# Altium PCB MJVESC_MINI_VER03.PcbDoc (part 1 of 3)
Units mm, origin at the board's own origin, x right, y up, seen from the top; angles counter-clockwise.
Board outline 57.82 x 58.2 mm, 4 copper layers (Top Layer, Mid Layer 1, Mid Layer 2, Bottom Layer), stack 1.63 mm thick; 123 components, 106 nets, 471 pads, 471 vias.
Unrouted connection lines stored in the file: 33.
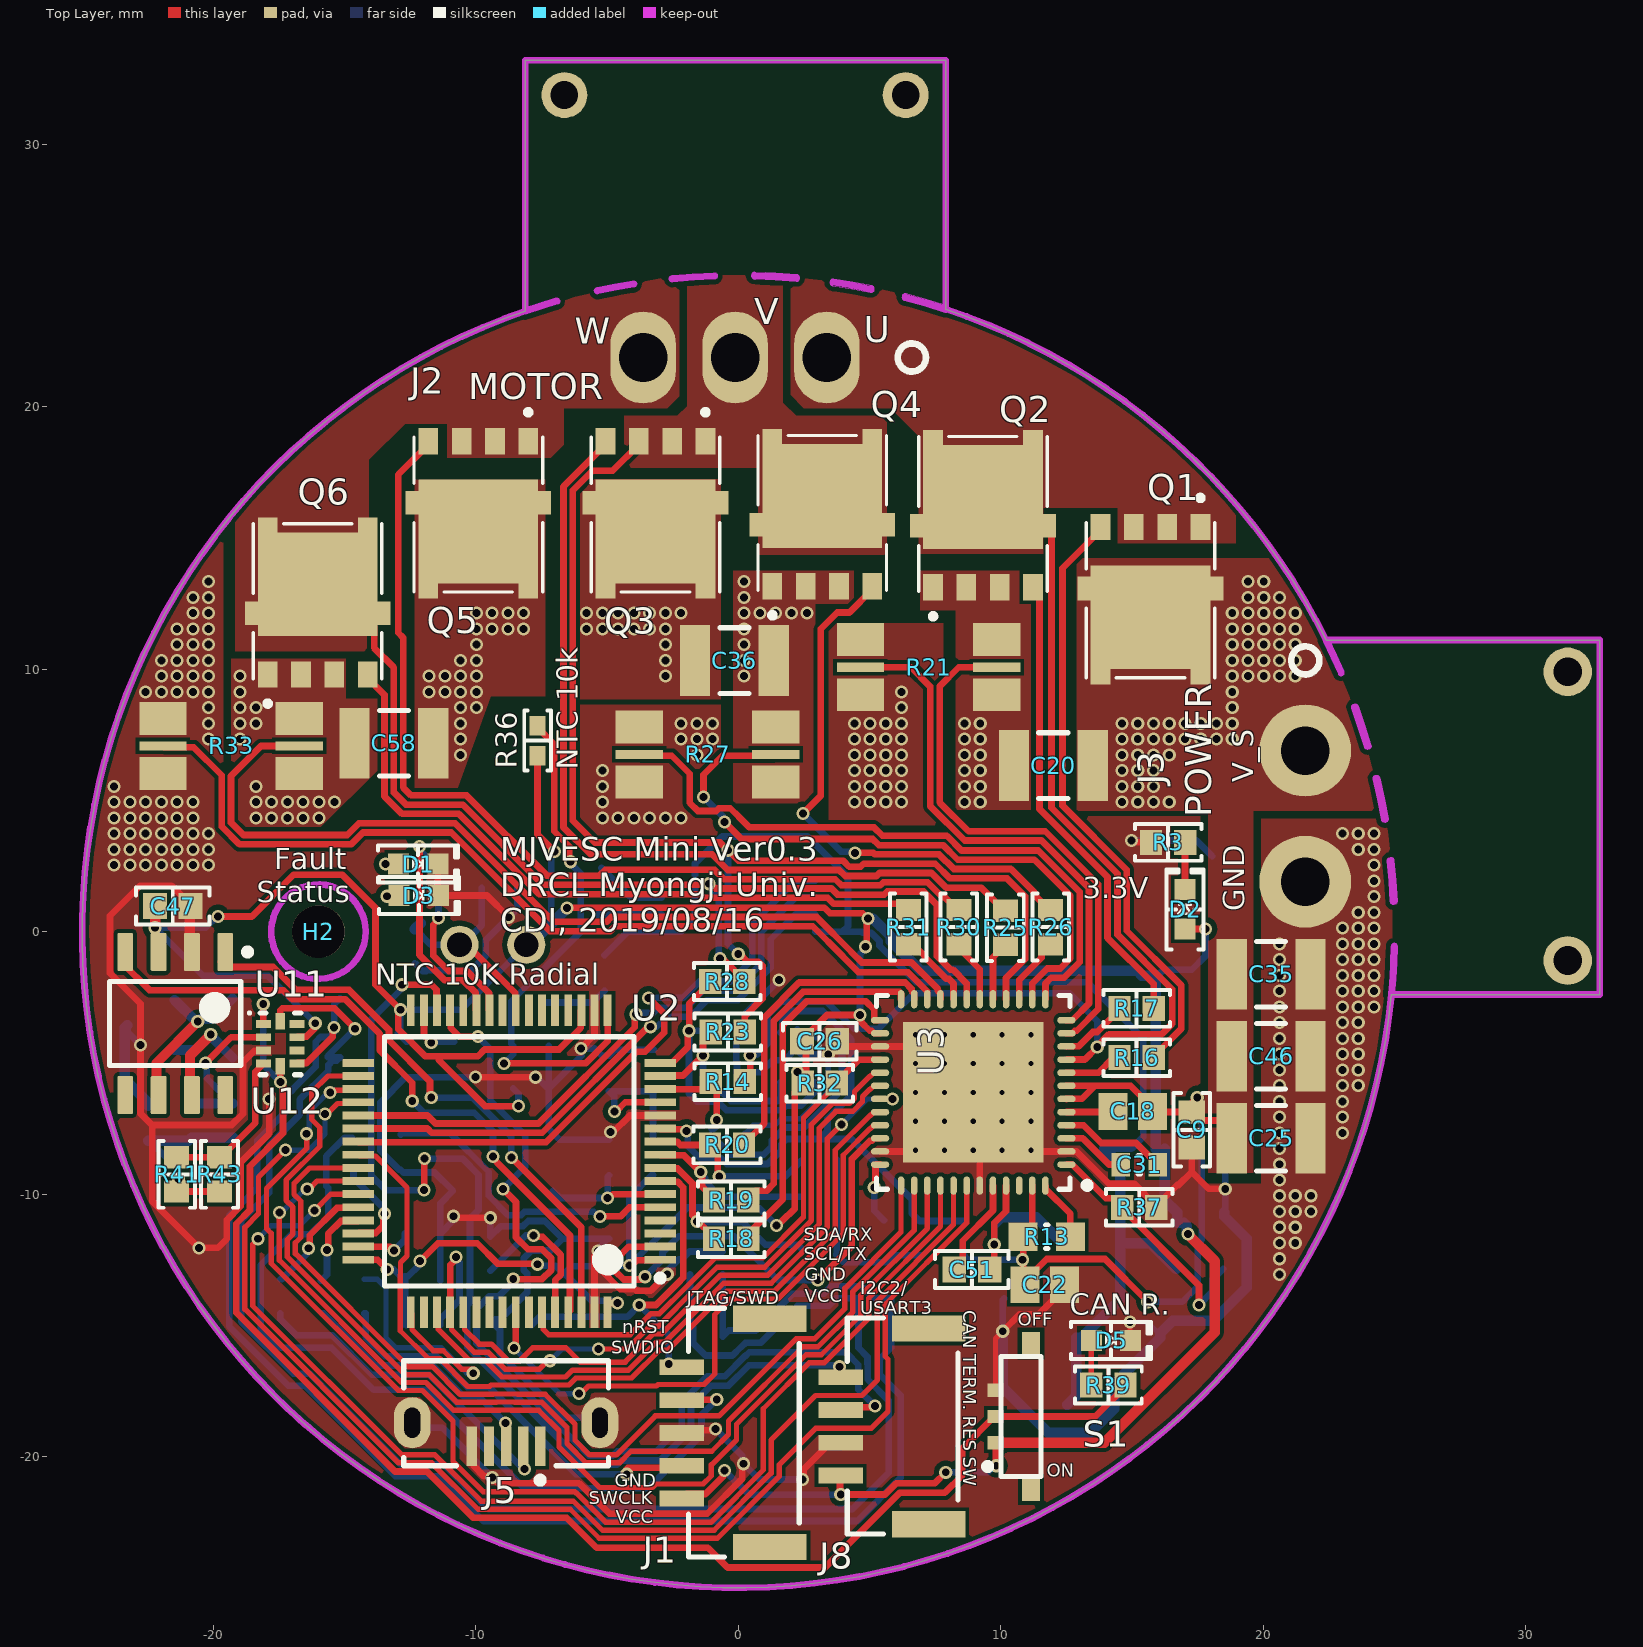
[diagram p0: Top Layer view]
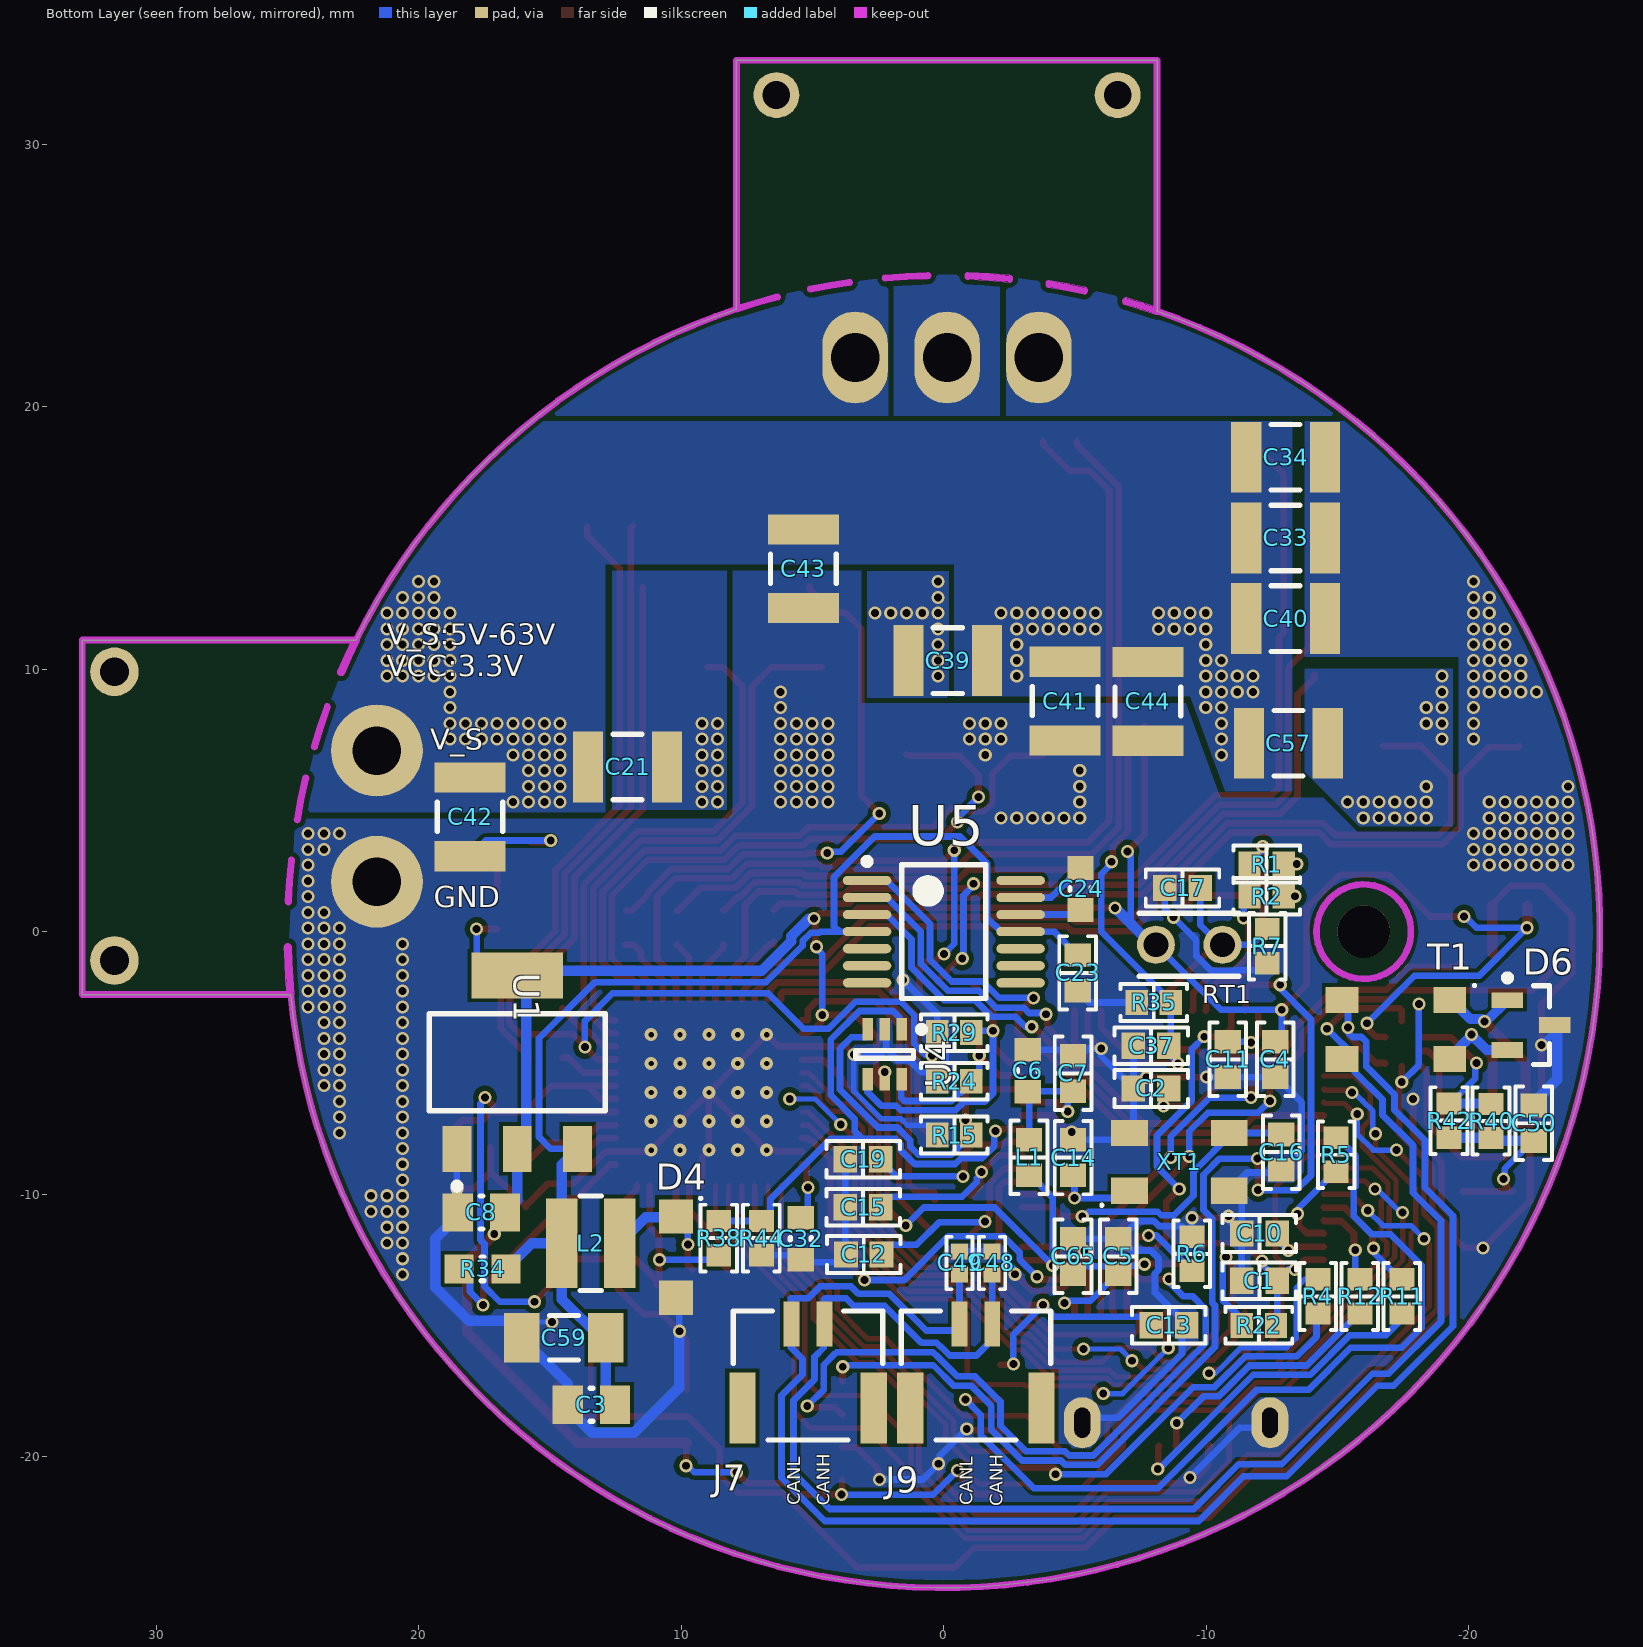
[diagram p1: Bottom Layer view, seen from below]

## Layer stack, top to bottom
Top Solder: solder mask 0.0102, Solder Resist, Dk 3.5
Top Layer: signal copper 0.07
Dielectric 1: core 0.45, FR-4, Dk 4.2
Mid Layer 1: signal copper 0.07
Dielectric 3: prepreg 0.45, FR-4, Dk 4.2
Mid Layer 2: signal copper 0.07
Dielectric 2: core 0.45, FR-4, Dk 4.2
Bottom Layer: signal copper 0.07
Bottom Solder: solder mask 0.0102, Solder Resist, Dk 3.5

## Board outline
7.898,23.72 cw(c0,0) 22.395,11.111 22.395,11.11 32.825,11.11 32.825,-2.398 24.887,-2.398 24.885,-2.398 cw(c0,0) -8.123,23.644 -8.125,23.644 -8.125,33.2 7.9,33.2
cut-out: 22.281,11.054 cw(c0,0) 22.849,9.827 ccw(c22.966,9.877) 23.093,9.877 ccw(c22.966,9.877) 23.083,9.928 ccw(c0,0) 22.509,11.167 ccw(c22.395,11.111)
cut-out: 23.858,7.03 ccw(c0,0) 23.373,8.506 cw(c23.493,8.55) 23.612,8.593 cw(c0,0) 24.103,7.102 cw(c23.981,7.066) 24.108,7.066 cw(c23.981,7.066)
cut-out: 24.505,4.263 ccw(c0,0) 24.186,5.805 cw(c24.31,5.835) 24.433,5.864 cw(c0,0) 24.756,4.306 cw(c24.63,4.285) 24.757,4.285 cw(c24.63,4.285)
cut-out: 24.846,1.148 ccw(c0,0) 24.727,2.689 cw(c24.853,2.703) 24.98,2.717 cw(c0,0) 25.101,1.159 cw(c24.973,1.153) 25.101,1.153 cw(c24.973,1.153)
cut-out: 24.76,-2.365 ccw(c24.887,-2.377) 25.014,-2.388 ccw(c0.004,0) 25.121,-0.578 ccw(c24.993,-0.577) 24.866,-0.572 cw(c0.01,-0.001)
cut-out: -8.083,23.522 cw(c-8.125,23.643) -8.166,23.763 cw(c0,0) -6.969,24.142 cw(c-6.934,24.019) -6.807,24.019 cw(c-6.934,24.019) -6.899,23.897 ccw(c0,0)
cut-out: -5.327,24.295 cw(c-5.354,24.42) -5.382,24.544 cw(c0,0) -4.025,24.803 cw(c-4.004,24.677) -3.877,24.677 cw(c-4.004,24.677) -3.984,24.551 ccw(c0,0)
cut-out: -2.49,24.748 cw(c-2.502,24.874) -2.515,25.001 cw(c0,0) -0.929,25.11 cw(c-0.925,24.983) -0.797,24.983 cw(c-0.925,24.983) -0.92,24.856 ccw(c0,0)
cut-out: 0.622,24.865 cw(c0,0) 2.198,24.775 ccw(c2.209,24.902) 2.336,24.902 ccw(c2.209,24.902) 2.22,25.029 ccw(c0,0) 0.628,25.12 ccw(c0.625,24.992)
cut-out: 3.598,24.611 cw(c0,0) 5.031,24.358 ccw(c5.057,24.483) 5.184,24.483 ccw(c5.057,24.483) 5.083,24.608 ccw(c0,0) 3.635,24.863 ccw(c3.616,24.737)
cut-out: 6.33,24.054 cw(c0,0) 7.86,23.598 ccw(c7.9,23.719) 8.027,23.719 ccw(c7.9,23.719) 7.94,23.84 ccw(c0,0) 6.395,24.3 ccw(c6.362,24.177)

## Design rules (kind name [scope] priority, off if disabled: settings)
Clearance [All] p1: gap=0.15 ignorepadtopadclearanceinfootprint=FALSE except(0: Arc-Hole Track-Hole SMDPad-Hole THPad-Hole Via-Hole Fill-Hole Poly-Hole Region-Hole Text-Hole; 0.1: Arc-Arc Arc-Track Track-Track; 0.203: THPad-Via THPad-Fill THPad-Poly THPad-Region THPad-Text Via-Via Via-Fill Via-Poly Via-Region Via-Text Fill-Fill Fill-Poly Fill-Region Fill-Text Poly-Poly Poly-Region Poly-Text Region-Region Region-Text Text-Text)
DiffPairsRouting [All] p1: maxlimit=0.254 minlimit=0.203 mostfreqgap=0.203 toplayer_minwidth=0.203 toplayer_maxwidth=0.381 toplayer_prefwidth=0.254 midlayer1_minwidth=0.203 midlayer1_maxwidth=0.381 midlayer1_prefwidth=0.254 midlayer2_minwidth=0.203 midlayer2_maxwidth=0.381 midlayer2_prefwidth=0.254 bottomlayer_minwidth=0.203 bottomlayer_maxwidth=0.381 bottomlayer_prefwidth=0.254 maxuncoupledlength=12.7
HoleToHoleClearance [All] p1: gap=0.2 allowstackedmicrovias=TRUE
MinimumSolderMaskSliver [All] p1: minsoldermaskwidth=0.04
PolygonConnect "PolygonConnect - V_SUPPLY" [InNet('V_SUPPLY')] p1: connectstyle=Direct reliefconductorwidth=0.254 reliefentries=4 polygonreliefangle="90 Angle" airgapwidth=0.254
PolygonConnect "PolygonConnect - PH_A" [InNet('PH_A')] p2: connectstyle=Direct reliefconductorwidth=0.254 reliefentries=4 polygonreliefangle="90 Angle" airgapwidth=0.254
PolygonConnect "PolygonConnect - NetC20_2" [InNet('NetC20_2')] p3: connectstyle=Direct reliefconductorwidth=0.254 reliefentries=4 polygonreliefangle="90 Angle" airgapwidth=0.254
PolygonConnect "PolygonConnect - NetC36_2" [InNet('NetC36_2')] p4: connectstyle=Direct reliefconductorwidth=0.254 reliefentries=4 polygonreliefangle="90 Angle" airgapwidth=0.254
PolygonConnect "PolygonConnect - NetC57_2" [InNet('NetC57_2')] p5: connectstyle=Direct reliefconductorwidth=0.254 reliefentries=4 polygonreliefangle="90 Angle" airgapwidth=0.254
PolygonConnect "PolygonConnect - PH_B" [InNet('PH_B')] p6: connectstyle=Direct reliefconductorwidth=0.254 reliefentries=4 polygonreliefangle="90 Angle" airgapwidth=0.254
PolygonConnect "PolygonConnect - PH_C" [InNet('PH_C')] p7: connectstyle=Direct reliefconductorwidth=0.254 reliefentries=4 polygonreliefangle="90 Angle" airgapwidth=0.254
PolygonConnect "PolygonConnect - SHA" [InNet('SHA')] p8: connectstyle=Direct reliefconductorwidth=0.254 reliefentries=4 polygonreliefangle="90 Angle" airgapwidth=0.254
PolygonConnect "PolygonConnect - SHB" [InNet('SHB')] p9: connectstyle=Direct reliefconductorwidth=0.254 reliefentries=4 polygonreliefangle="90 Angle" airgapwidth=0.254
PolygonConnect "PolygonConnect - SHC" [InNet('SHC')] p10: connectstyle=Direct reliefconductorwidth=0.254 reliefentries=4 polygonreliefangle="90 Angle" airgapwidth=0.254
PolygonConnect "PolygonConnect - GND" [InNet('GND')] p11: connectstyle=Direct reliefconductorwidth=0.254 reliefentries=4 polygonreliefangle="90 Angle" airgapwidth=0.254
PolygonConnect [All] p12: connectstyle=Relief reliefconductorwidth=0.254 reliefentries=4 polygonreliefangle="90 Angle" airgapwidth=0.254
RoutingVias [All] p1: holewidth=0.711 width=1.27 viastyle="Through Hole" minholewidth=0.711 minwidth=1.27 maxholewidth=0.711 maxwidth=1.27 useviatemplates=TRUE viatemplateguid#1={498FC635-D1B7-4224-9D86-076B19A399F8} viatemplatename#1=v50h30m0mx0
SilkToSilkClearance [All] p1 off: silktosilkclearance=0.254
SilkToSolderMaskClearance [IsPad] p1 off: minsilkscreentomaskgap=0.1 clearancetoexposedcopper=TRUE
SolderMaskExpansion [All] p1: expansion=0.102
Width [All] p1: maxlimit=0.4 minlimit=0.203 preferedwidth=0.254
25 further rules are at their usual default settings.

## Classes and differential pairs
component class mcu: C1 C2 C3 C4 C5 C6 C7 C8 C10 C11 C13 C14 C16 C17 C23 C24 C65 D1 D2 D3 J1 J2 J3 J5 J7 J8 J9 L1 R1 R2 R3 R4 R5 R6 R7 R11 R12 RT1 U1 U2 U5 XT1
component class DRV8301: C9 C12 C15 C18 C19 C20 C21 C22 C25 C26 C31 C32 C33 C34 C35 C36 C37 C39 C40 C41 C42 C43 C44 C46 C51 C57 C58 C59 D4 H2 L2 Q1 Q2 Q3 Q4 Q5 Q6 R13 R14 R15 R16 R17 R18 R19 R20 R21 R22 R23 R24 R25 R26 R27 R28 R29 R30 R31 R32 R33 R34 R35 R36 R37 R38 R44 U3 U4
component class CAN: C47 C48 C49 C50 D5 D6 R39 R40 R41 R42 R43 S1 T1 U11 U12
differential pair CANHL: +CANHL_P -CANHL_N
differential pair USB_D: +USB_D_P -USB_D_N
differential pair CAN: +CAN_P -CAN_N
differential pair CAN_TRES: +CAN_TRES_P -CAN_TRES_N

## Components (designator, comment, footprint, x,y, rotation, side; value= is the part's Value field where it differs from the comment)
C1 "0.10µF" "CAP 0603/1608" -12.027,-13.303 r180 bottom
C2 "0.10µF" "CAP 0603/1608" -7.9,-5.975 r0 bottom
C3 "4.7uF" CAPC0805(2012)145_N 13.425,-18.025 r180 bottom
C4 "0.10µF" "CAP 0603/1608" -12.627,-4.869 r90 bottom
C5 "0.10µF" "CAP 0603/1608" -6.65,-12.375 r90 bottom
C6 "1uF 6.3V" CAPC0603(1608)100_N -3.2,-5.3 r90 bottom value=1uF
C7 "0.10µF" "CAP 0603/1608" -4.927,-5.403 r90 bottom
C8 "4.7uF" CAPC0805(2012)145_N 17.619,-10.7 r180 bottom
C9 "0.1uF 100V" "CAP 0603/1608" 17.275,-7.55 r90 top
C10 "2.2µF" "CAP 0603/1608" -12.027,-11.498 r180 bottom
C11 "2.2µF" "CAP 0603/1608" -10.822,-4.869 r90 bottom
C12 "4.7nF" "CAP 0603/1608" 3.05,-12.3 r0 bottom
C13 "0.10µF" "CAP 0603/1608" -8.575,-15 r0 bottom
C14 "10pF" "CAP 0603/1608" -4.927,-8.607 r90 bottom
C15 "4.7nF" "CAP 0603/1608" 3.075,-10.5 r0 bottom
C16 "10pF" "CAP 0603/1608" -12.86,-8.403 r270 bottom
C17 "2.2µF" "CAP 0603/1608" -9.096,1.664 r180 bottom
C18 "1uF 100V" C0805 15.025,-6.85 r0 top
C19 "4.7nF" "CAP 0603/1608" 3.075,-8.675 r0 bottom
C20 "CAP 10uF 100V 1210(3225)" CAPC1210(3225)280_N 12,6.325 r180 top value=10uF
C21 "CAP 10uF 100V 1210(3225)" CAPC1210(3225)280_N 12.05,6.275 r180 bottom value=10uF
C22 "1uF 100V" C0805 11.675,-13.45 r180 top
C23 "0.10µF" "CAP 0603/1608" -5.1,-1.575 r90 bottom
C24 "1uF 6.3V" CAPC0603(1608)100_N -5.213,1.625 r90 bottom value=1uF
C25 "CAP 10uF 100V 1210(3225)" CAPC1210(3225)280_N 20.3,-7.872 r0 top value=10uF
C26 "0.10µF" "CAP 0603/1608" 3.1,-4.175 r0 top
C31 "47nF" CAPC0603(1608)100_L 15.275,-8.875 r0 top
C32 "1uF 6.3V" CAPC0603(1608)100_N 5.45,-11.701 r90 bottom value=1uF
C33 "CAP 10uF 100V 1210(3225)" CAPC1210(3225)280_N -13.025,15 r180 bottom value=10uF
C34 "CAP 10uF 100V 1210(3225)" CAPC1210(3225)280_N -13.025,18.075 r180 bottom value=10uF
C35 "CAP 10uF 100V 1210(3225)" CAPC1210(3225)280_N 20.3,-1.625 r0 top value=10uF
C36 "CAP 10uF 100V 1210(3225)" CAPC1210(3225)280_N -0.15,10.325 r0 top value=10uF
C37 "2.2µF" "CAP 0603/1608" -7.9,-4.35 r180 bottom
C39 "CAP 10uF 100V 1210(3225)" CAPC1210(3225)280_N -0.15,10.325 r0 bottom value=10uF
C40 "CAP 10uF 100V 1210(3225)" CAPC1210(3225)280_N -13.025,11.925 r180 bottom value=10uF
C41 "CAP 10uF 100V 1210(3225)" CAPC1210(3225)280_N -4.625,8.782 r270 bottom value=10uF
C42 "CAP 10uF 100V 1210(3225)" CAPC1210(3225)280_N 18.05,4.375 r270 bottom value=10uF
C43 "CAP 10uF 100V 1210(3225)" CAPC1210(3225)280_N 5.35,13.825 r270 bottom value=10uF
C44 "CAP 10uF 100V 1210(3225)" CAPC1210(3225)280_N -7.775,8.775 r270 bottom value=10uF
C46 "CAP 10uF 100V 1210(3225)" CAPC1210(3225)280_N 20.3,-4.75 r0 top value=10uF
C47 "2.2µF" "CAP 0603/1608" -21.55,0.975 r180 top
C48 "100pF" "CAP 0402/1005" -1.841,-12.625 r270 bottom
C49 "100pF" "CAP 0402/1005" -0.6,-12.625 r90 bottom
C50 "4.7nF" "CAP 0603/1608" -22.475,-7.3 r90 bottom
C51 "220nF" "CAP 0603/1608" 8.9,-12.875 r180 top
C57 "CAP 10uF 100V 1210(3225)" CAPC1210(3225)280_N -13.129,7.175 r180 bottom value=10uF
C58 "CAP 10uF 100V 1210(3225)" CAPC1210(3225)280_N -13.125,7.175 r180 top value=10uF
C59 "10uF" CAPC1206(3216)190_M 14.475,-15.475 r180 bottom
C65 "0.10µF" "CAP 0603/1608" -4.925,-12.375 r270 bottom
D1 "Red" "LED 0603/1608 RED" -12.2,2.575 r0 top
D2 "Blue" "LED 0603/1608 BLUE" 17.019,0.85 r90 top
D3 "Green" "LED 0603/1608 GREEN" -12.175,1.375 r0 top
D4 "PMEG6020AELR" SOD123W 10.2,-12.4 r270 bottom
D5 "Red" "LED 0603/1608 RED" 14.2,-15.575 r0 top
D6 "Bidirectional Symmetric TVS" SOT23-3L -22.375,-3.56 r180 bottom
H2 "Hole" M2-HOLE -16,0 r0 top
J1 "JTAG/SWD" "JST BM05B-GHS-TBT" 0.287,-19.1 r270 top
J2 "MOTOR" "MR30PW - MIRROR" -3.625,21.875 r0 top
J3 "POWER" "XT30PW - MIRROR" 21.6,1.9 r90 top
J5 "USB3140-30-0230-1-C" GCT-USB3140_V -8.85,-19.155 r180 top
J7 "CAN" "JST SM02B-GHS-TB" 5.173,-16.825 r0 bottom
J8 "I2C/UART3" "JST BM04B-GHS-TBT" 6.337,-18.85 r270 top
J9 "CAN" "JST SM02B-GHS-TB" -1.225,-16.825 r0 bottom
L1 "Ferrite Beads 600ohm" "FER 0603/1608" -3.25,-8.6 r270 bottom value=10mH
L2 "22uH" 74438335220 13.45,-11.875 r0 bottom
Q1 "NTMFS5C604NLT1G" DFN500X600X110-5N 15.703,12.622 r180 top
Q2 "NTMFS5C604NLT1G" DFN500X600X110-5N 9.32,15.913 r0 top
Q3 "NTMFS5C604NLT1G" DFN500X600X110-5N -3.155,15.888 r180 top
Q4 "NTMFS5C604NLT1G" DFN500X600X110-5N 3.197,15.953 r0 top
Q5 "NTMFS5C604NLT1G" DFN500X600X110-5N -9.905,15.888 r180 top
Q6 "NTMFS5C604NLT1G" DFN500X600X110-5N -16.03,12.587 r0 top
R1 "220R" "RES 0603/1608" -12.3,2.575 r180 bottom
R2 "220R" "RES 0603/1608" -12.3,1.35 r180 bottom
R3 "1k" "RES 0603/1608" 16.375,3.4 r180 top
R4 "22R" "RES 0603/1608" -14.25,-13.9 r90 bottom
R5 "22R" "RES 0603/1608" -14.95,-8.502 r270 bottom
R6 "47K" "RES 0603/1608" -9.45,-12.275 r270 bottom
R7 "10K" "RES 0603/1608" -12.325,-0.55 r270 bottom
R11 "22R" "RES 0603/1608" -17.45,-13.9 r270 bottom
R12 "22R" "RES 0603/1608" -15.85,-13.9 r270 bottom
R13 "54K9" RESC0603(1608)_M 11.75,-11.625 r180 top value="54900.00 Ohm"
R14 "39k" "RES 0603/1608" -0.4,-5.714 r0 top
R15 "2k2" "RES 0603/1608" -0.4,-7.75 r180 bottom
R16 "4.7R" "RES 0603/1608" 15.175,-4.8 r0 top
R17 "4.7R" "RES 0603/1608" 15.175,-2.925 r0 top
R18 "100R" "RES 0603/1608" -0.275,-11.7 r180 top
R19 "100R" "RES 0603/1608" -0.275,-10.225 r180 top
R20 "100R" "RES 0603/1608" -0.431,-8.125 r180 top
R21 "2mOhm" CSS2H-2512K-2L00F 7.25,10.075 r180 top
R22 "10K" "RES 0603/1608" -12.005,-15 r0 bottom
R23 "39k" "RES 0603/1608" -0.4,-3.822 r0 top
R24 "2k2" "RES 0603/1608" -0.4,-5.7 r180 bottom
R25 "4.7R" "RES 0603/1608" 10.175,0.15 r90 top
R26 "4.7R" "RES 0603/1608" 11.9,0.175 r90 top
R27 "2mOhm" CSS2H-2512K-2L00F -1.175,6.75 r180 top
R28 "39k" "RES 0603/1608" -0.425,-1.9 r0 top
R29 "2k2" "RES 0603/1608" -0.4,-3.85 r180 bottom
R30 "4.7R" "RES 0603/1608" 8.4,0.175 r90 top
R31 "4.7R" "RES 0603/1608" 6.475,0.175 r90 top
R32 "10K" "RES 0603/1608" 3.1,-5.775 r0 top
R33 "2mOhm" CSS2H-2512K-2L00F -19.325,7.075 r180 top
R34 "54K9" RESC0603(1608)_M 17.575,-12.85 r180 bottom value="54900.00 Ohm"
R35 "10K" "RES 0603/1608" -8,-2.7 r0 bottom
R36 "NTC 10k" "RES 0402/1005" -7.65,7.275 r270 top
R37 "10K" "RES 0603/1608" 15.275,-10.503 r0 top
R38 "39k" "RES 0603/1608" 8.575,-11.675 r270 bottom
R39 "1k" "RES 0603/1608" 14.1,-17.275 r180 top
R40 "120R" "RES 0603/1608" -20.85,-7.216 r270 bottom
R41 "120R" "RES 0603/1608" -21.4,-9.25 r90 top
R42 "120R" "RES 0603/1608" -19.25,-7.2 r270 bottom
R43 "120R" "RES 0603/1608" -19.769,-9.25 r90 top
R44 "2k2" "RES 0603/1608" 6.95,-11.675 r270 bottom
RT1 "NTC 10K Radial" SEMI-103AT-2_V -9.35,-0.5 r0 bottom
S1 "SSAJ120100" SSAJ120100 11.15,-18.475 r0 top
T1 "Common Mode Choke" SRF4532-101Y -17.225,-3.725 r0 bottom
U1 "3.3V" SOT-223-2 16.25,-4.975 r180 bottom
U2 "STM32F405RGT6U" STM-LQFP64_V -8.729,-8.753 r180 top
U3 "DRV8323RSRGZR" VQFN-48_N 8.95,-6.125 r180 top
U4 "TPD4S009DCKR" DCK6_N 2.25,-4.675 r270 bottom
U5 "AS5047P-ATSM" AMS-TSSOP-14-5000X4400DE_M 0,0 r180 bottom
U11 "TCAN332GDR" D0008A_N -21.455,-3.5 r270 top
U12 "TS5A23159" RSE10 -17.45,-4.275 r0 top
XT1 "8 MHz" DFN220P320X110-4N -8.975,-8.775 r180 bottom

## Footprints (in the part's own frame and the unit in brackets; to place one, negate y for a bottom-side part, rotate by r counter-clockwise, add the part's x,y. Pads: shape width x height; smd on the part's side, far side on the other; paste and mask are expansions set on the pad)
74438335220 [mm] "3015 size"
  rect 1.2x3.4 smd: 1(-1.1,0) 2(1.1,0)
  silkscreen extent -0.4,-1.8 0.4,1.8, body extent -1.5,-1.5 1.5,1.5, height 1.5
AMS-TSSOP-14-5000X4400DE_M [mm] "AS5147"
  oval 1.85x0.35 smd: 1(-2.925,1.95) 2(-2.925,1.3) 3(-2.925,0.65) 4(-2.925,0) 5(-2.925,-0.65) 6(-2.925,-1.3) 7(-2.925,-1.95) 8(2.925,-1.95) 9(2.925,-1.3) 10(2.925,-0.65) 11(2.925,0) 12(2.925,0.65) 13(2.925,1.3) 14(2.925,1.95)
  silkscreen extent -3.05,-2.55 1.6,2.8, body extent -2.25,-2.55 2.25,2.55, height 1.2
C0805 [mm] "Chip Capacitor, Body 2.0x1.3mm, IPC High Density"
  rect 1.1x1.4 smd: 1(-0.75,0) 2(0.75,0)
  body extent -1.1,-0.72 1.1,0.72, height 1.4
"CAP 0402/1005" [mm]
  rect 0.6x0.64 smd: 1(-0.44,0) 2(0.44,0)
  silkscreen extent -1,-0.5 1,0.5, body extent -0.5,-0.26 0.5,0.26, height 0.52
"CAP 0603/1608" [mm]
  rect 0.9x1 smd: 1(-0.675,0) 2(0.675,0)
  silkscreen extent -1.4,-0.7 1.4,0.7, body extent -0.8,-0.41 0.8,0.41, height 0.82
CAPC0603(1608)100_L [mm] "Chip Capacitor, Body 1.6x0.8mm, Height 1.0mm, IPC High Density"
  rect 0.7x0.9 smd: 1(-0.7,0) 2(0.7,0)
  silkscreen extent -0.05,-0.35 0.05,0.35, body extent -0.87,-0.47 0.88,0.48, height 1
CAPC0603(1608)100_N [mm] "Chip Capacitor, Body 1.6x0.8mm, Height 1.0mm, IPC Medium Density"
  rect 0.9x1 smd: 1(-0.8,0) 2(0.8,0)
  silkscreen extent -0.05,-0.4 0.05,0.4, body extent -0.87,-0.48 0.88,0.47, height 1
CAPC0805(2012)145_N [mm] "Chip Capacitor, Body 2.0x1.2mm, Height 1.45mm, IPC Medium Density"
  rect 1.15x1.45 smd: 1(-0.9,0) 2(0.9,0)
  silkscreen extent -0.05,-0.62 0.05,0.63, body extent -1.1,-0.72 1.1,0.73, height 1.45
CAPC1206(3216)190_M [mm]
  rect 1.35x1.9 smd: 1(-1.6,0) 2(1.6,0)
  silkscreen extent -0.55,-0.85 0.55,0.85, body extent -1.7,-0.9 1.7,0.9, height 1.9
CAPC1210(3225)280_N [mm] "Chip Capacitor, Body 3.2x2.5mm, Height 2.8mm, IPC Medium Density"
  rect 1.15x2.7 smd: 1(-1.5,0) 2(1.5,0)
  silkscreen extent -0.55,-1.25 0.55,1.25, body extent -1.7,-1.4 1.7,1.4, height 2.8
CSS2H-2512K-2L00F [mm] "2mOhm"
  rect 1.8x1.25 smd: 1(-2.6,-1.05) 1(-2.6,1.05) 2(2.6,-1.05) 2(2.6,1.05)
  rect 1.8x0.35 smd: 3(-2.6,0) 4(2.6,0)
  body extent -3.17,-1.55 3.18,1.5, height 1.06
D0008A_N [mm]
  rrect17% 1.45x0.6 smd: 1(-2.725,1.905) 2(-2.725,0.635) 3(-2.725,-0.635) 4(-2.725,-1.905) 5(2.725,-1.905) 6(2.725,-0.635) 7(2.725,0.635) 8(2.725,1.905)
  silkscreen extent -2.85,-2.5 1.6,2.88, body extent -3,-2.45 3,2.45, height 1.63
DCK6_N [mm] "SOT23, 6-Leads, Body 2x1.3mm, Pitch 0.65mm, Lead Span 2.1mm, IPC Medium Density"
  rect 0.85x0.4 smd: 1(-0.95,0.65) 2(-0.95,0) 3(-0.95,-0.65) 4(0.95,-0.65) 5(0.95,0) 6(0.95,0.65)
  silkscreen extent -1.07,-1.1 0.15,1.52, body extent -0.7,-1.07 0.7,1.08, height 1.1
DFN220P320X110-4N [mm]
  rect 1.4x1 smd: 1(-1.9,-1.1) 3(1.9,1.1) G(-1.9,1.1) G(1.9,-1.1)
  silkscreen extent -3,-1.7 -2.9,-1.6, body extent -2.55,-1.65 2.55,1.65, height 1.1
DFN500X600X110-5N [mm]
  rect 0.75x1 smd: 1(-1.905,-2.795) 2(-0.635,-2.795) 3(0.635,-2.795) 4(1.905,-2.795)
  rect 4.56x3.955 smd: 5_6(0,0.647)
  rect 0.495x0.905 smd: 5_6_1(-2.528,-0.452) 5_6_2(2.528,-0.453)
  rect 0.75x0.575 smd: 5_6_3(1.905,2.913) 5_6_4(-1.905,2.913)
  silkscreen extent -2.45,-4 2.45,2.95, body extent -2.56,-3.1 2.59,3.05, height 1.13
"FER 0603/1608" [mm]
  rect 0.9x1 smd: 1(-0.675,0) 2(0.675,0)
  silkscreen extent -1.4,-0.7 1.4,0.7, body extent -0.8,-0.41 0.8,0.41, height 0.82
GCT-USB3140_V [mm] "USB, Micro B, Body 7.8x4mm, Pitch 0.65mm"
  rect 0.4x1.5 smd: 1(-1.3,0.445) 2(-0.65,0.445) 3(0,0.445) 4(0.65,0.445) 5(1.3,0.445)
  oval 1.4x1.95 hole 0.6 slot 1.15 at 90 deg: 6(-3.575,-0.445) 7(3.575,-0.445)
  silkscreen extent -3.9,-2.8 3.9,1.87, body extent -3.9,-2.81 3.9,1.19, height 6.55
"JST BM04B-GHS-TBT" [mm]
  rect 0.6x1.7 smd: 1(1.875,-2.437) 2(0.625,-2.437) 3(-0.625,-2.437) 4(-1.875,-2.437)
  rect 1x2.8 smd: M(-3.725,0.913) M(3.725,0.913)
  silkscreen extent -4.13,-2.19 4.1,2.03, body extent -4.13,-2.92 4.12,2.03, height 4.18
"JST BM05B-GHS-TBT" [mm] "JST GH Series 1.25mm pitch, top entry connector"
  rect 0.6x1.7 smd: 1(2.5,-2.437) 2(1.25,-2.437) 3(0,-2.437) 4(-1.25,-2.437) 5(-2.5,-2.437)
  rect 1x2.8 smd: M(-4.35,0.913) M(4.35,0.913)
  silkscreen extent -4.75,-2.19 4.72,2.03, body extent -4.75,-2.92 4.75,2.03, height 4.18
"JST SM02B-GHS-TB" [mm]
  rect 0.6x1.7 smd: 1(-0.625,-1.875) 2(0.625,-1.875)
  rect 1x2.7 smd: M(-2.5,1.325) M(2.5,1.325)
  silkscreen extent -2.85,-2.38 2.85,2.54, body extent -2.87,-2.31 2.87,2.54, height 4.35
"LED 0603/1608 BLUE" [mm]
  rect 0.8x0.8 smd: 1(-0.75,0) 2(0.75,0)
  silkscreen extent -1.52,-0.7 1.52,0.7, body extent -0.8,-0.4 0.8,0.4, height 0.53
"LED 0603/1608 GREEN" [mm]
  rect 0.8x0.8 smd: 1(-0.75,0) 2(0.75,0)
  silkscreen extent -1.52,-0.7 1.52,0.7, body extent -0.8,-0.4 0.8,0.4, height 0.53
"LED 0603/1608 RED" [mm]
  rect 0.8x0.8 smd: 1(-0.75,0) 2(0.75,0)
  silkscreen extent -1.52,-0.7 1.52,0.7, body extent -0.8,-0.4 0.8,0.4, height 0.53
M2-HOLE [mm] "M2-HOLE"
  round 2 hole 2: 0(0,0)
  Keep-Out Layer circle w0.254: c0,0 r1.8
"MR30PW - MIRROR" [mm]
  oval 2.5x3.5 hole 1.85: 1(7,0) 2(3.5,0) 3(0,0)
  round 1.75 hole 1.05: ""(-3,10) ""(10,10)
  silkscreen extent 9.7,-0.54 10.77,0.54, body extent -4.5,-0.91 11.51,13.57, height 4.91
"RES 0402/1005" [mm]
  rect 0.75x0.6 smd: 1(-0.575,0) 2(0.575,0)
  silkscreen extent -1.14,-0.51 1.14,0.51, body extent -0.5,-0.25 0.5,0.25, height 0.35
"RES 0603/1608" [mm]
  rect 0.85x0.95 smd: 1(-0.65,0) 2(0.65,0)
  silkscreen extent -1.27,-0.7 1.27,0.7, body extent -0.8,-0.4 0.8,0.4, height 0.45
RESC0603(1608)_M [mm] "Chip Resistor, Body 1.6x0.8mm, IPC Low Density"
  rect 1.1x1.1 smd: 1(-0.9,0) 2(0.9,0)
  silkscreen extent -0.05,-0.45 0.05,0.45, body extent -0.85,-0.47 0.85,0.47, height 0.6
RSE10 [mm]
  rect 0.58x0.3 smd paste-0.025 mask+0.05: 1(-0.64,0.75) 2(-0.64,0.25) 3(-0.64,-0.25) 4(-0.64,-0.75) 6(0.64,-0.75) 7(0.64,-0.25) 8(0.64,0.25) 9(0.64,0.75)
  rect 0.35x0.63 smd paste-0.025 mask+0.05: 5(0,-0.86) 10(0,0.86)
  silkscreen extent -1.22,-1.18 0.78,1.22, body extent -0.77,-1.02 0.78,1.03, height 0.6
SEMI-103AT-2_V [mm] "THD, 2-Leads, Body Width 3.8mm (Max), Pitch 2.54mm"
  round 1.45 hole 0.95: 1(-1.27,0) 2(1.27,0)
  silkscreen extent -1.9,-1.2 1.9,1.2, body extent -1.9,-1.2 1.9,1.2, height 9.5
SOD123W [mm] "SOD123W"
  rect 1.3x1.3 smd: 1(-1.55,0) 2(1.55,0)
  silkscreen extent -2.29,0.89 -2.19,0.99, body extent -2,-0.95 2,0.95, height 1.1
SOT23-3L [mm]
  rect 1.2x0.6 smd: 1(-0.9,0.95) 2(-0.9,-0.95) 3(0.9,0)
  silkscreen extent -1.02,-1.5 0.7,1.92, body extent -0.7,-1.5 0.7,1.5, height 1.1
SOT-223-2 [mm]
  rect 1.1x1.75 smd: 1(-2.3,-3.3) 2(0,-3.3) 3(2.3,-3.3)
  rect 3.5x1.75 smd: 4(0,3.3)
  silkscreen extent -3.35,-4.85 3.35,1.85, body extent -3.35,-3.7 3.35,3.5, height 1.85
SRF4532-101Y [mm]
  rect 1.25x1 smd: 1(-2.05,-1.125) 2(2.05,-1.125) 3(2.05,1.125) 4(-2.05,1.125)
  silkscreen extent -3.05,-1.73 -2.95,-1.63, body extent -2.35,-1.7 2.35,1.7, height 2.8
SSAJ120100 [mm]
  rect 0.6x0.51 smd: 1(-1.355,-1) 2(-1.355,1) C(-1.355,0)
  rect 0.7x0.9 smd: ""(0,-2.775) ""(0,2.775)
  silkscreen extent -1.78,-2.29 0.38,2.29, body extent -1.14,-2.29 1.27,2.29, height 0.6
STM-LQFP64_V [mm] "Thin QFP, 64-Leads, Body 10x10mm, Pitch 0.5mm, ST Recommended"
  rect 1.2x0.3 smd: 1(-5.75,3.75) 2(-5.75,3.25) 3(-5.75,2.75) 4(-5.75,2.25) 5(-5.75,1.75) 6(-5.75,1.25) 7(-5.75,0.75) 8(-5.75,0.25) 9(-5.75,-0.25) 10(-5.75,-0.75) 11(-5.75,-1.25) 12(-5.75,-1.75) 13(-5.75,-2.25) 14(-5.75,-2.75) 15(-5.75,-3.25) 16(-5.75,-3.75) 33(5.75,-3.75) 34(5.75,-3.25) 35(5.75,-2.75) 36(5.75,-2.25) 37(5.75,-1.75) 38(5.75,-1.25) 39(5.75,-0.75) 40(5.75,-0.25) 41(5.75,0.25) 42(5.75,0.75) 43(5.75,1.25) 44(5.75,1.75) 45(5.75,2.25) 46(5.75,2.75) 47(5.75,3.25) 48(5.75,3.75)
  rect 0.3x1.2 smd: 17(-3.75,-5.75) 18(-3.25,-5.75) 19(-2.75,-5.75) 20(-2.25,-5.75) 21(-1.75,-5.75) 22(-1.25,-5.75) 23(-0.75,-5.75) 24(-0.25,-5.75) 25(0.25,-5.75) 26(0.75,-5.75) 27(1.25,-5.75) 28(1.75,-5.75) 29(2.25,-5.75) 30(2.75,-5.75) 31(3.25,-5.75) 32(3.75,-5.75) 49(3.75,5.75) 50(3.25,5.75) 51(2.75,5.75) 52(2.25,5.75) 53(1.75,5.75) 54(1.25,5.75) 55(0.75,5.75) 56(0.25,5.75) 57(-0.25,5.75) 58(-0.75,5.75) 59(-1.25,5.75) 60(-1.75,5.75) 61(-2.25,5.75) 62(-2.75,5.75) 63(-3.25,5.75) 64(-3.75,5.75)
  silkscreen extent -5.87,-4.75 4.75,4.75, body extent -5,-5 5,5, height 1.6
VQFN-48_N [mm] "QFN, 48-Leads, Body 7.08x7.08mm, Pitch 0.5mm, Thermal Pad 5.36x5.36mm, IPC Medium Density"
  oval 0.7x0.25 smd: 1(-3.55,2.75) 2(-3.55,2.25) 3(-3.55,1.75) 4(-3.55,1.25) 5(-3.55,0.75) 6(-3.55,0.25) 7(-3.55,-0.25) 8(-3.55,-0.75) 9(-3.55,-1.25) 10(-3.55,-1.75) 11(-3.55,-2.25) 12(-3.55,-2.75) 25(3.55,-2.75) 26(3.55,-2.25) 27(3.55,-1.75) 28(3.55,-1.25) 29(3.55,-0.75) 30(3.55,-0.25) 31(3.55,0.25) 32(3.55,0.75) 33(3.55,1.25) 34(3.55,1.75) 35(3.55,2.25) 36(3.55,2.75)
  oval 0.25x0.7 smd: 13(-2.75,-3.55) 14(-2.25,-3.55) 15(-1.75,-3.55) 16(-1.25,-3.55) 17(-0.75,-3.55) 18(-0.25,-3.55) 19(0.25,-3.55) 20(0.75,-3.55) 21(1.25,-3.55) 22(1.75,-3.55) 23(2.25,-3.55) 24(2.75,-3.55) 37(2.75,3.55) 38(2.25,3.55) 39(1.75,3.55) 40(1.25,3.55) 41(0.75,3.55) 42(0.25,3.55) 43(-0.25,3.55) 44(-0.75,3.55) 45(-1.25,3.55) 46(-1.75,3.55) 47(-2.25,3.55) 48(-2.75,3.55)
  rect 5.36x5.36 smd: 49(0,0)
  silkscreen extent -4.47,-3.69 3.69,3.69, body extent -3.54,-3.54 3.54,3.54, height 1
"XT30PW - MIRROR" [mm]
  round 3.5 hole 1.85: 1(5,0) 2(0,0)
  round 1.85 hole 1.1: ""(-3,-10) ""(8,-10)
  silkscreen extent 7.9,-0.54 8.97,0.53, body extent -4.21,-14.03 9.09,0.97, height 5

## Part data
C1 C2 C4 C5 C7 C13 C23 C26 C65: library part GRM188R71E104KA01D, "CAP CER 0.1UF 25V X7R 0603", Capacitance=0.10レF, Manufacturer="Murata Electronics North America", Operating Temperature="-55∑C ~ 125∑", Package / Case="0603 (1608 Metric)", Ratings=-, Supplier Part Number 1=490-1524-1-ND, Temperature Coefficient=X7R, Tolerance=【10%, Voltage - Rated=25V, Applications="General Purpose", Category=Capacitors, ComponentLink1Description=http://www.murata.com/~/media/webrenewal/support/library/catalog/products/capacitor/mlcc/c02e.pdf, ComponentLink1URL=http://www.murata.com/~/media/webrenewal/support/library/catalog/products/capacitor/mlcc/c02e.pdf, Features=-, Height - Seated (Max)=-, Lead Spacing=-, Lead Style=-, Manufacturer Part Number=GRM188R71E104KA01D, Mounting Type="Surface Mount, MLCC", Packaging="Cut Tape (CT)", Partnumber=GRM188R71E104KA01D, Pricing 1="1=0.1, 10=0.019, 50=0.0104, 100=0.0088, 250=0.0072, 500=0.00616, 1000=0.0048 (USD)", RoHS="RoHS Compliant", Size / Dimension="0.063\" L x 0.031\" W (1.60mm x 0.80mm)", Stock 1=1667481, Supplier 1=Digi-Key, Thickness (Max)="0.035\" (0.90mm)"
C3 C8: library part CMP-1036-04898-1, "CAP 4.7uF 35V 【10% 0805 (2012 Metric) Thickness 1.45mm SMD", Case-EIA=0805, Case-Metric=2012, Rated Voltage="35 V", Tolerance=A【10%, Max Thickness="1.45 mm", Technology=SMT
C6 C24 C32: library part CMP-1035-02730-1, "CAP 1uF 6.3V 【10% 0603 (1608 Metric) Thickness 1mm SMD", Case-EIA=0603, Case-Metric=1608, Partnumber=CC0603KRX7R5BB105, Rated Voltage="6.3 V", Tolerance=A【10%, Max Thickness="1 mm", Technology=SMT
C9: library part CAP, "Multilayer Ceramic Capacitors MLCC - SMD/SMT 0603 0.1uF 100volts X7R 10%", Manufacturer=Murata, Part Number=GCJ188R72A104KA01D
C10 C11 C17 C37 C47: library part GRM188R61C225KE15D, "CAP CER 2.2UF 16V X5R 0603", Capacitance=2.2レF, Manufacturer="Murata Electronics North America", Operating Temperature="-55∑C ~ 85∑", Package / Case="0603 (1608 Metric)", Ratings=-, Supplier Part Number 1=490-3296-1-ND, Temperature Coefficient=X5R, Tolerance=【10%, Voltage - Rated=16V, Applications="General Purpose", Category=Capacitors, ComponentLink1Description=http://www.murata.com/~/media/webrenewal/support/library/catalog/products/capacitor/mlcc/c02e.pdf, ComponentLink1URL=http://www.murata.com/~/media/webrenewal/support/library/catalog/products/capacitor/mlcc/c02e.pdf, Features=-, Height - Seated (Max)=-, Lead Spacing=-, Lead Style=-, Manufacturer Part Number=GRM188R61C225KE15D, Mounting Type="Surface Mount, MLCC", Packaging="Cut Tape (CT)", Partnumber=GRM188R61C225KE15D, Pricing 1="1=0.12, 10=0.08, 50=0.046, 100=0.038, 250=0.032, 500=0.0268, 1000=0.022 (USD)", RoHS="RoHS Compliant", Size / Dimension="0.063\" L x 0.031\" W (1.60mm x 0.80mm)", Stock 1=1255740, Supplier 1=Digi-Key, Thickness (Max)="0.035\" (0.90mm)"
C12 C15 C19 C50: library part GRM1885C1H222JA01D, "CAP CER 4.7nF 50V NP0 0603", Partnumber=GRM1887U1H472JA01D
C14 C16: library part GRM1885C1H100JA01D, "CAP CER 10PF 50V NP0 0603", Manufacturer="Murata Electronics North America", Operating Temperature="-55∑C ~ 125∑", Package / Case="0603 (1608 Metric)", Ratings=-, Supplier Part Number 1=490-1403-1-ND, Temperature Coefficient="C0G, NP0", Tolerance=【5%, Voltage - Rated=50V, Applications="General Purpose", Capacitance=10pF, Category=Capacitors, ComponentLink1Description=http://www.murata.com/~/media/webrenewal/support/library/catalog/products/capacitor/mlcc/c02e.pdf, ComponentLink1URL=http://www.murata.com/~/media/webrenewal/support/library/catalog/products/capacitor/mlcc/c02e.pdf, Features=-, Height - Seated (Max)=-, Lead Spacing=-, Lead Style=-, Manufacturer Part Number=GRM1885C1H100JA01D, Mounting Type="Surface Mount, MLCC", Packaging="Cut Tape (CT)", Partnumber=GRM1885C1H100JA01D, Pricing 1="1=0.1, 10=0.041, 50=0.0222, 100=0.0187, 250=0.01532, 500=0.0131, 1000=0.0102 (USD)", RoHS="RoHS Compliant", Size / Dimension="0.063\" L x 0.031\" W (1.60mm x 0.80mm)", Stock 1=450321, Supplier 1=Digi-Key, Thickness (Max)="0.035\" (0.90mm)"
C18 C22: library part CAP, "Multilayer Ceramic Capacitors MLCC - SMD/SMT 1.0UF 100V 10% 0805", Manufacturer=Murata, Part Number=GRM21BC72A105KE01L
C20 C21 C25 C33 C34 C35 C36 C39 C40 C41 C42 C43 C44 C46 C57 C58: library part CMP-1038-02106-1, "100Vdc 10uF 10% 1210/2502", Case-EIA=1210, Case-Metric=3225, Partnumber=GRM32EC72A106KE05L, Rated Voltage="100 V", Tolerance=A【20%, Max Thickness="2.8 mm", Technology=SMT
C31: library part CMP-1035-02502-1, "CAP 47nF 16V 【5% 0603 (1608 Metric) Thickness 1mm SMD", Case-EIA=0603, Case-Metric=1608, Partnumber=CC0603KRX7R7BB473, Rated Voltage="16 V", Tolerance=A【10%, Max Thickness="1 mm", Technology=SMT
C48 C49: library part GRM1885C1H222JA01D, "CAP CER 100pF 50V NP0 0402", Partnumber=GRM1555C1H101GA01D
C51: library part GRM188R71E104KA01D, "CAP CER 220nF 50V X7R 0603", Partnumber=GRM188R71H224KAC4J
C59: "Multilayer Ceramic Capacitors MLCC - SMD/SMT 16V 10uF 10% 1.60mm X8L AEC-Q200", Partnumber=CGA5L1X8L1C106K160AC
D1 D5: library part LED0, "Typical INFRARED GaAs LED", Partnumber=LTST-C191KRKT, LatestRevisionDate=08-Jul-2005, LatestRevisionNote="Mech Layer 1 removed.", PackageDescription="LED; 2 Leads", PackageReference=LED-0, Published=8-Jun-2000, Publisher="Altium Limited"
D2: library part LED0, "Typical INFRARED GaAs LED", Partnumber=LTST-C191TBKT, LatestRevisionDate=08-Jul-2005, LatestRevisionNote="Mech Layer 1 removed.", PackageDescription="LED; 2 Leads", PackageReference=LED-0, Published=8-Jun-2000, Publisher="Altium Limited"
D3: library part LED0, "Typical INFRARED GaAs LED", Partnumber=LTST-C191KGKT, LatestRevisionDate=08-Jul-2005, LatestRevisionNote="Mech Layer 1 removed.", PackageDescription="LED; 2 Leads", PackageReference=LED-0, Published=8-Jun-2000, Publisher="Altium Limited"
D4: "60 V, 2 A low leakage current Schottky barrier rectifier", Partnumber=PMEG6020AELR
D6: library part ESD8V0L2B-03L, "Bi-directional Low Capacitance TVS Diode, -55 to 125 degC, TSLP-3-1, Reel, Green", Partnumber=VCAN26A2-03S-E3-08
H2: "M2, M2.5, M3 Hole"
J1: library part "JST BM05B-GHS-TBT", "JST GH Connector, 5Pin, Vertical", Partnumber=BM05B-GHS-TBT, LatestRevisionDate=17-Jul-2002, LatestRevisionNote="Re-released for DXP Platform.", Publisher="Altium Limited"
J2: library part MR30PW-M, "AMASS, MR30,  on PCBs, 30A 500V, UL94V, -20...120∑C", LatestRevisionDate=17-Jul-2002, LatestRevisionNote="Re-released for DXP Platform.", Parameter 1=XT30PW-M, Publisher="Altium Limited"
J3: library part XT30PW-M, "AMASS, XT30,  on PCBs, 30A 500V, UL94V, -20...120∑C", LatestRevisionDate=17-Jul-2002, LatestRevisionNote="Re-released for DXP Platform.", Parameter 1=XT30PW-M, Publisher="Altium Limited"
J5: library part CMP-2000-07368-1, "Micro USB Receptacle, Type B, SMT, Vertical, with Through-Hole Shell Stakes, -30 to 85 degC, 5-Pin SMD, RoHS, Tape and Reel", Manufacturer="Global Connector Technology", Package Description="5-Pin Surface Mount Device, Body 7.8 x 4 mm, Pitch 0.65 mm", Package Reference=USB3140, Connector Mounting=PCB, Connector Type=USB2.0MicroB, Contact Material=Copper, Contact Plating=Gold, Contact Termination=SurfaceMountVertical, Datasheet URL=http://www.farnell.com/datasheets/1913332.pdf, Datasheet Version="Rev. B2, 04/2015", Gender=Receptacle, Manufacturer URL=http://gct.co/, Mounting Technology=SurfaceMount, No. of Contacts=5, No. of Positions=5, No. of Rows=1, Orientation=Vertical, Partnumber=USB3140, Pitch=0.65mm, Series=USB3140, SVHC=NoSVHC(19-Dec-2012)
J7 J9: library part "JST SM02B-GH", "JST GH Connector, 2Pin", Partnumber=SM02B-GHS-TB(LF)(SN), LatestRevisionDate=17-Jul-2002, LatestRevisionNote="Re-released for DXP Platform.", Publisher="Altium Limited"
J8: library part "JST BM04B-GH", "JST GH Connector, 4Pin", Partnumber=BM04B-GHS-TB(LF)(SN)
L1: library part Inductor, "Ferrite Beads 600MHz 0.015Ohm 25% 1608 AEC-Q200", Partnumber=KPZ1608SHR601ATD25, Code_IEC=1005, Code_JEITA=0402, LatestRevisionDate=29-May-2009, LatestRevisionNote="IPC-7351 Footprint Added.", PackageDescription="Chip Inductor", PackageReference=0402-A, Published=8-Jun-2000, Publisher="Altium Limited"
L2: library part 74438335220, "Fixed Inductors WE-MAPI SMD 3015 22uH 0.60A 1040mOhm", Partnumber=74438335220
Q1 Q2 Q3 Q4 Q5 Q6: "Power MOSFET / 60 V, 1.2 m, 287 A, Single N?Channel", Manufacturer="International Rectifier", Power Dissipation @ TC="25C (W)=380", Circuit=Discrete, ComponentLink1Description="Manufacturer URL", ComponentLink1URL=http://www.irf.com/, ComponentLink2Description=Datasheet, ComponentLink2URL=http://www.irf.com/product-info/datasheets/data/irls3036-7ppbf.pdf, ComponentLink3Description="Package Specification", ComponentLink3URL=http://ec.irf.com/v6/en/US/adirect/ir?cmd=catSearchFrame&domSendTo=byID&domProductQueryName=IRLS3036-7PPbF, DatasheetVersion=Oct-10, ID @ TC="100C (A)=210", Mounting Technology="Surface Mount", PackageDescription="7-Pin Long Leads Package Outline, Body 10.16 x 9.015 mm, Pitch 1.27 mm", PackageReference=D2PAK-7, Packing=Tube, Partnumber=NTMFS5C604NLT1G, Qgd Typ (nC)=53.0, Qg Typ (nC)=110.0, RDS(on) Max 4.5V (mOhms)=2.2, RDS(on) Max 10V (mOhms)=1.9, Rth(JC) (C/W)=0.40, Tj Max=175, VGs Max(V)=16
R1 R2: library part Res3, "RES SMD 220R OHM 1% 1/10W 0603", Partnumber=RC0603FR-10220RL, LatestRevisionDate=29-May-2009, LatestRevisionNote="IPC-7351 Footprint Added.", PackageDescription="Chip Resistor", PackageReference=J1-0603, Published=8-Jun-2000, Publisher="Altium Limited"
R3 R39: library part RC0603FR-071KL, "RES SMD 1K OHM 1% 1/10W 0603", Manufacturer=Yageo, Operating Temperature="-55∑C ~ 155∑", Package / Case="0603 (1608 Metric)", Power (Watts)="0.1W, 1/10W", Supplier Device Package=0603, Supplier Part Number 1=311-1.00KHRCT-ND, Temperature Coefficient=【100ppm/∑, Tolerance=【1%, Category=Resistors, ComponentLink1Description=http://www.yageo.com/documents/recent/PYu-RC_Group_51_RoHS_L_04.pdf, ComponentLink1URL=http://www.yageo.com/documents/recent/PYu-RC_Group_51_RoHS_L_04.pdf, Composition="Thick Film", Features="Moisture Resistant", Height="0.022\" (0.55mm)", Manufacturer Part Number=RC0603FR-071KL, Number of Terminations=2, Packaging="Cut Tape (CT)", Partnumber=RC0603FR-071KL, Pricing 1="1=0.1, 10=0.014, 25=0.01, 100=0.0057, 250=0.00436, 500=0.00348, 1000=0.00257, 2500=0.00223 (USD)", Resistance (Ohms)=1k, RoHS="RoHS Compliant", Size / Dimension="0.063\" L x 0.031\" W (1.60mm x 0.80mm)", Stock 1=6734836, Supplier 1=Digi-Key
R4 R5 R11 R12: library part RC0603FR-0722RL, "RES SMD 22 OHM 1% 1/10W 0603", Manufacturer=Yageo, Operating Temperature="-55∑C ~ 155∑", Package / Case="0603 (1608 Metric)", Power (Watts)="0.1W, 1/10W", Resistance (Ohms)=22, Supplier Device Package=0603, Supplier Part Number 1=311-22.0HRCT-ND, Temperature Coefficient=【100ppm/∑, Tolerance=【1%, Category=Resistors, ComponentLink1Description=http://www.yageo.com/documents/recent/PYu-RC_Group_51_RoHS_L_04.pdf, ComponentLink1URL=http://www.yageo.com/documents/recent/PYu-RC_Group_51_RoHS_L_04.pdf, Composition="Thick Film", Features="Moisture Resistant", Height="0.022\" (0.55mm)", Manufacturer Part Number=RC0603FR-0722RL, Number of Terminations=2, Packaging="Cut Tape (CT)", Partnumber=RC0603FR-0722RL, Pricing 1="1=0.1, 10=0.014, 25=0.01, 100=0.0057, 250=0.00436, 500=0.00348, 1000=0.00257, 2500=0.00223 (USD)", RoHS="RoHS Compliant", Size / Dimension="0.063\" L x 0.031\" W (1.60mm x 0.80mm)", Stock 1=575303, Supplier 1=Digi-Key
R6: library part RC0603FR-0747KL, "RES SMD 47K OHM 1% 1/10W 0603", Manufacturer=Yageo, Operating Temperature="-55∑C ~ 155∑", Package / Case="0603 (1608 Metric)", Power (Watts)="0.1W, 1/10W", Resistance (Ohms)=47k, Supplier Device Package=0603, Supplier Part Number 1=311-47.0KHRCT-ND, Temperature Coefficient=【100ppm/∑, Tolerance=【1%, Category=Resistors, ComponentLink1Description=http://www.yageo.com/documents/recent/PYu-RC_Group_51_RoHS_L_04.pdf, ComponentLink1URL=http://www.yageo.com/documents/recent/PYu-RC_Group_51_RoHS_L_04.pdf, Composition="Thick Film", Features="Moisture Resistant", Height="0.022\" (0.55mm)", Manufacturer Part Number=RC0603FR-0747KL, Number of Terminations=2, Packaging="Cut Tape (CT)", Partnumber=RC0603FR-0747KL, Pricing 1="1=0.1, 10=0.014, 25=0.01, 100=0.0057, 250=0.00436, 500=0.00348, 1000=0.00257, 2500=0.00223 (USD)", RoHS="RoHS Compliant", Size / Dimension="0.063\" L x 0.031\" W (1.60mm x 0.80mm)", Stock 1=930868, Supplier 1=Digi-Key
R7 R22 R32 R35 R37: library part RC0603FR-0710KL, "RES SMD 10K OHM 1% 1/10W 0603", Manufacturer=Yageo, Operating Temperature="-55∑C ~ 155∑", Package / Case="0603 (1608 Metric)", Power (Watts)="0.1W, 1/10W", Resistance (Ohms)=10k, Supplier Device Package=0603, Supplier Part Number 1=311-10.0KHRCT-ND, Temperature Coefficient=【100ppm/∑, Tolerance=【1%, Category=Resistors, ComponentLink1Description=http://www.yageo.com/documents/recent/PYu-RC_Group_51_RoHS_L_04.pdf, ComponentLink1URL=http://www.yageo.com/documents/recent/PYu-RC_Group_51_RoHS_L_04.pdf, Composition="Thick Film", Features="Moisture Resistant", Height="0.022\" (0.55mm)", Manufacturer Part Number=RC0603FR-0710KL, Number of Terminations=2, Packaging="Cut Tape (CT)", Partnumber=RC0603FR-0710KL, Pricing 1="1=0.1, 10=0.014, 25=0.01, 100=0.0057, 250=0.00436, 500=0.00348, 1000=0.00257, 2500=0.00223 (USD)", RoHS="RoHS Compliant", Size / Dimension="0.063\" L x 0.031\" W (1.60mm x 0.80mm)", Stock 1=13504930, Supplier 1=Digi-Key
R13 R34: library part CMP-1012-00707-1, "54K9 0.1W 1% 0603 (1608 Metric)  SMD", Case-EIA=0603, Case-Metric=1608, Partnumber=RC0603FR-0754K9L, Power="0.1 W", Tolerance="1 %", Technology=SMT
R14 R23 R28 R38: library part Res3, "RES SMD 39K OHM 1% 1/10W 0603", Partnumber=RC0603FR-0739KL, LatestRevisionDate=29-May-2009, LatestRevisionNote="IPC-7351 Footprint Added.", PackageDescription="Chip Resistor", PackageReference=J1-0603, Published=8-Jun-2000, Publisher="Altium Limited"
R15 R24 R29 R44: library part Res3, "RES SMD 2.2K OHM 1% 1/10W 0603", Partnumber=RC0603FR-072K2L, LatestRevisionDate=29-May-2009, LatestRevisionNote="IPC-7351 Footprint Added.", PackageDescription="Chip Resistor", PackageReference=J1-0603, Published=8-Jun-2000, Publisher="Altium Limited"
R16 R17 R25 R26 R30 R31: library part RC0603FR-072RL, "4.7R 0.1W 1% 0603 (1608 Metric)  SMD", Partnumber=RC0603FR-074R7L
R18 R19 R20: library part RC0603FR-07120RL, "RES SMD 100R OHM 1% 1/10W 0603", Partnumber=RC0603JR-07100RL
R21 R27 R33: library part CSS2H-2512K-2L00F, "Current Sense Resistors - SMD 2mOhms 5W 1% AEC-Q200", Partnumber=CSS2H-2512K-2L00F
R36: library part NCP15XH103F03RC, "THERMISTOR 10K OHM NTC 0402 SMD", Partnumber=NCP15XH103F03RC
R40 R41 R42 R43: library part Res3, "RES SMD 120R OHM 1% 1/10W 0603", Partnumber=RC0603FR-07120RL, LatestRevisionDate=29-May-2009, LatestRevisionNote="IPC-7351 Footprint Added.", PackageDescription="Chip Resistor", PackageReference=J1-0603, Published=8-Jun-2000, Publisher="Altium Limited"
RT1: library part CMP-2000-05824-1, "NTC Thermistors 10Kohms 5% Radial / NTCLE100E3103JT2 (Vishay - cheap)", Manufacturer=Semitec, Operating Temperature Range=-50Cto+110C, Package Description="2-Pin Through Hole Device, Body Width 3.8 mm (Max), Pitch 2.54 mm", Package Reference=103AT-2, Partnumber=NTCLE100E3103JT2, Resistance=10kOhms, Tolerance=1%, Brand=Semitec, Datasheet URL=https://www.rapidonline.com/pdf/61-0500e.pdf, Datasheet Version="Rev. A, 02/2007", Height=2.4mm, Lead Spacing=2.54mm, Length=17mm, Manufacturer URL=http://www.semitec.co.jp/english/, Mounting Technology=ThroughHole, Packaging=Bulk, Product Category=Thermistors-NTC, RoHS=True, Series=AT, Termination Style=Radial, Type=NTC, Width=3.7mm
S1: library part SW-SPDT, "SPDT Subminiature Toggle Switch, Right Angle Mounting, Vertical Actuation", ComponentLink1Description="Manufacturer Link", ComponentLink1URL=http://www.apem.com, DatasheetVersion=05-Dec-2000, LatestRevisionDate=17-Dec-2003, LatestRevisionNote="Schematic revised, PCB Footprint replaced.", PackageDescription="Switch; 4 Leads", PackageReference=TL36WW15050, Partnumber=SSAJ120100, Published=24-Mar-1999, Publisher="Altium Limited"
T1: library part "MID-D11, 070-5627", "Dual Coil - Common Mode Choke, 4-Terminal, THT, MID-D11, Bobbin-070-5627", Partnumber=SRF4532-101Y
U1: library part AZ1117EH-3.3TRG1, "IC REG LDO 3.3V 1A SOT223", Current - Limit (Min)=-, Current - Output=1A, Manufacturer="Diodes Incorporated", Operating Temperature="-40∑C ~ 125∑", Package / Case="TO-261-4, TO-261AA", Supplier Device Package=SOT-223, Supplier Part Number 1=AZ1117EH-3.3TRG1DICT-ND, Voltage - Dropout (Typical)="1.1V @ 1A", Voltage - Input="Up to 13V", Category="Integrated Circuits (ICs)", ComponentLink1Description=http://www.diodes.com/assets/Datasheets/AZ1117E.pdf, ComponentLink1URL=http://www.diodes.com/assets/Datasheets/AZ1117E.pdf, Mounting Type="Surface Mount", Packaging="Cut Tape (CT)", Partnumber=AZ1117EH-3.3TRG1, Part Status=Active, Pricing 1="1=0.43, 10=0.321, 100=0.1815, 500=0.12022, 1000=0.09216 (USD)", Regulator Topology="Positive Fixed", RoHS="RoHS Compliant", Stock 1=22748, Supplier 1=Digi-Key, Voltage - Output=3.3V
U2: library part STM32F405RGT6, "ARM Cortex-M4 32-bit MCU+FPU, 210 DMIPS, 1024 kB Flash, 192 kB Internal RAM, 51 I/Os, 64-pin LQFP, -40 to 85 degC, Tray", I/Os (High Current)=51, Manufacturer=STMicroelectronics, Operating Frequency(F) (Processor speed) (MHz)=168, Supply Voltage(Vcc) max (V)=3.6, Supply Voltage(Vcc) min (V)=1.8, ComponentLink1Description="Manufacturer URL", ComponentLink1URL=http://www.st.com/web/en/home.html, ComponentLink2Description=Datasheet, ComponentLink2URL=http://www.st.com/st-web-ui/static/active/en/resource/technical/document/datasheet/DM00037051.pdf, ComponentLink3Description="Package Specification", ComponentLink3URL=http://www.st.com/st-web-ui/static/active/en/resource/technical/document/datasheet/DM00037051.pdf, Core="ARM Cortex-M4", D/A Converter=2x12-bit, DatasheetVersion="Rev. 4", FLASH Size (Prog) (kB)=1024, Internal RAM Size (kB)=192, Mounting Technology="Surface Mount", PackageDescription="64-Pin Low Profile Quad Flat Package, 10 x 10 mm Body, 0.5 mm Pitch", PackageReference=LQFP64, PackageVersion="Rev. 4, 06/2013", Packing=Tray, Partnumber=STM32F405RGT6U
U3: "Gate Drivers 60V Three-Phase Smart Gate Driver With Buck Regulator and Three Current Shunt Amplifiers 48-VQFN -40 to 125", Partnumber=DRV8323RSRGZR
U4: library part CMP-0326-00063-1, "ESD Solution for High-Speed Differential Interface, 4 Channels, -40 to +85 degC, 6-pin SC70 (DCK), Green (RoHS & no Sb/Br)", Breakdown Voltage(Min)(V)=9, Differential Capacitance(pF)=0.05, IO Capacitance(Typ)(pF)=0.8, IO Leakage Current(nA)=10, Manufacturer="Texas Instruments", Code_JEDEC=MO-203-AB, ComponentLink1Description=Datasheet, ComponentLink1URL=http://www.ti.com/general/docs/lit/getliterature.tsp?genericPartNumber=TPD4S009&fileType=pdf, ComponentLink2Description="URL Link1", ComponentLink2URL=SamplesURL:http://www.ti.com/product/tpd4s009#samples, DatasheetVersion=SLVS817E, Eco-Plan="Green (RoHS & no Sb/Br)", IEC 61000-4-2 Air-Gap(+/- kV)=9, IEC 61000-4-2 Contact(+/- kV)=8, Mounting Technology="Surface Mount", PackageDescription="6-Pin Plastic Small-Outline Package, 2 x 1.3 mm Body, 0.65 mm Pitch, 2.1 mm Lead Span", PackageReference=DCK6, PackageVersion="revG, Jan-2007", Partnumber=TPD4S009DCKR, SubFamily="ESD Solution"
U5: library part AS5147, "AS5147-HTSM", Partnumber=AS5047P-ATSM
U11: "3.3V CAN Transceiver, 5Mbps", Drivers Per Package=1, Manufacturer="Texas Instruments", Supply Voltage(s)(V)=3.3, ComponentLink1Description=Datasheet, ComponentLink1URL=http://www.ti.com/general/docs/lit/getliterature.tsp?genericPartNumber=SN65HVD233&fileType=pdf, Eco-Plan="Green (RoHS & no Sb/Br)", Mounting Technology="Surface Mount", PackageDescription="8-Pin Plastic Small Outline Integrated Circuit, 4.9 x 3.9 mm, Pitch 1.27 mm Pitch", PackageReference=D0008A, Partnumber=TCAN332GDR, SubFamily=CAN, Transient Pulse Protection(V)="-100 to 100"
U12: library part "TI TS5A23159", "1-ヘ 2-Channel SPDT Analog Switch", Partnumber=TS5A23159RSER
XT1: library part ABM3B-8.000MHZ-10-1-U-T, "Crystal 8MHz 【10ppm 10pF 200 Ohm -10∑C ~ 60∑C Surface Mount 4-SMD, No Lead (DFN, LCC)", Partnumber=ABM3B-8.000MHZ-10-1UT

## Via types
v1: diameter 0.5, hole 0.3, Top Layer to Bottom Layer, tented both sides, 446 vias
v2: diameter 0.5, hole 0.2, Top Layer to Bottom Layer, 25 vias

## Nets (pads, with @x,y where several pads share a name; then routed paths per layer and width w, separated by ;. In a path a pad name is that pad's centre, name@x,y a point inside that pad or via, vN(x,y) a via of type N, cw(c..) or ccw(c..) an arc to the next point about the centre after c; other vN are vias at no path point)
AN_IN: R38.1 R44.1 U2.11 U4.1 | length 22.6
  Top Layer w0.254: U2.11@-2.979,-7.503 -2.956,-7.526 -2.116,-7.526 -2.042,-7.6 v1(-1.975,-7.6)
  Bottom Layer w0.254: v1(-1.975,-7.6) -1.928,-7.647 -1.928,-8.164 -1.456,-8.636 -0.656,-8.636 -0.436,-8.856 1.11,-8.856 1.634,-8.332 1.634,-8.1 1.835,-7.898 3.103,-7.898 ; U4.1@1.605,-3.842 1.673,-3.774 1.673,-3.285 1.935,-3.023 3.215,-3.023 4.306,-4.114 4.306,-6.224 3.398,-7.132 3.398,-7.602 3.103,-7.898 ; R38.1@8.575,-11.025 R44.1@6.95,-11.025 6.9,-11.025 6.602,-10.727 6.602,-10.185 4.315,-7.898 3.103,-7.898
CAL: U2.2 U3.34 | length 18.3
  Top Layer w0.254: v1(-3.55,-13.151) -3.617,-13.151 -3.718,-13.252 -4.368,-13.252 -4.677,-12.943 -4.677,-12.507 -4.173,-12.003 U2.2@-2.979,-12.003 ; v1(3.025,-13.275) 4.324,-11.976 4.324,-8.657 5.008,-7.973 5.081,-7.973 5.179,-7.875 U3.34@5.4,-7.875
  Bottom Layer w0.254: v1(-3.55,-13.151) -3.55,-13.147 -2.889,-12.486 -2.889,-12.222 -2.276,-11.608 -0.165,-11.608 1.502,-13.275 v1(3.025,-13.275)
CAN_N: C49.1 J7.2 J9.2 T1.2 U12.6 | length 62.9
  Top Layer w0.254: U12.6@-16.81,-5.025 -16.787,-5.002 -16.455,-5.002 -15.448,-3.995 -15.448,-3.697 v1(-15.401,-3.65)
  Bottom Layer w0.254: v1@-15.401,-3.839 -15.577,-4.015 -15.915,-4.015 -16.1,-4.201 -16.1,-5.138 -16.962,-6 -16.971,-5.991 -16.971,-6.009 -17.173,-6.211 -17.173,-6.794 -17.482,-7.102 -17.488,-7.102 -18.332,-7.946 -18.332,-9.757 -19.402,-10.827 -19.402,-15.037 -17.139,-17.3 -16.515,-17.3 -13.065,-20.75 -11.421,-20.75 -9.836,-22.335 -9.833,-22.335 -9.711,-22.457 4.535,-22.457 6.184,-20.808 6.184,-17.668 5.386,-16.87 5.386,-16.289 5.825,-15.85 5.825,-13.973 5.173,-13.973 4.716,-13.516 3.529,-13.516 3.243,-13.802 2.066,-13.802 0.668,-15.2 -0.366,-15.2 -0.6,-15.434 J9.2@-0.6,-14.95 C49.1@-0.6,-13.065 ; v1(-15.401,-3.65) -15.401,-2.768 T1.2@-15.175,-2.542
CAN_P: C48.2 J7.1 J9.1 T1.3 U12.10 | length 62.6
  Top Layer w0.254: U12.10@-17.45,-3.415 -17.45,-3 -17.375,-2.925 -15.375,-2.925 v1(-14.6,-3.7)
  Bottom Layer w0.254: T1.3@-15.643,-4.792 -15.175,-4.792 -15.302,-4.919 -15.464,-4.919 -15.62,-5.075 -15.62,-5.304 -16.716,-6.4 -16.716,-6.983 -17.292,-7.559 -17.299,-7.559 -17.875,-8.135 -17.875,-9.946 -18.945,-11.016 -18.945,-14.848 -16.949,-16.843 -16.326,-16.843 -12.876,-20.293 -11.232,-20.293 -9.647,-21.878 -9.644,-21.878 -9.522,-22 4.346,-22 5.727,-20.618 5.727,-17.858 4.929,-17.059 4.929,-16.478 4.924,-16.473 4.924,-16.203 4.575,-15.854 4.575,-14.021 4.527,-13.973 3.719,-13.973 3.433,-14.259 2.255,-14.259 0.844,-15.67 0.269,-15.67 0.124,-15.815 0.109,-15.815 -0.226,-16.15 -1.246,-16.15 -1.723,-15.673 -1.723,-15.077 J9.1@-1.85,-14.95 -1.841,-14.941 C48.2@-1.841,-13.065 ; T1.3@-15.643,-4.743 v1(-14.6,-3.7)
CAN_RX: U2.61 U11.4 | length 25.7
  Top Layer w0.254: U11.4@-23.481,-1.184 -22.436,-2.229 -17.344,-2.229 -17.002,-2.571 -14.984,-2.571 -13.667,-3.888 -13.667,-4.514 -12.425,-5.756 v1(-12.425,-6.448) ; v1(-9.35,-8.562) -9.35,-8.629 -9.174,-8.805 -9.174,-8.818 -6.417,-11.576 -6.417,-14.441 U2.61@-6.479,-14.503
  Bottom Layer w0.254: v1(-12.425,-6.448) -11.975,-6.898 -10.06,-6.898 -9.35,-7.608 v1(-9.35,-8.562)
CAN_TRES_N: R41.2 R43.2 U12.4 | length 5.9
  Top Layer w0.254: R41.2@-21.4,-8.6 R43.2@-19.769,-8.6 -19.719,-8.6 -18.402,-7.283 -18.402,-5.337 U12.4@-18.09,-5.025
CAN_TRES_P: R40.1 R42.1 U12.2 | length 6.2
  Top Layer w0.254: v1(-20.301,-5) -19.326,-4.025 U12.2@-18.09,-4.025
  Bottom Layer w0.254: v1(-20.301,-5) -20.254,-5.047 -20.254,-5.585 -19.809,-6.03 -19.809,-6.041 -19.3,-6.55 R42.1@-19.25,-6.55
  Bottom Layer w0.381: R40.1@-20.85,-6.566 -20.834,-6.55 R42.1@-19.25,-6.55
CAN_TX: U2.62 U11.1 | length 22.2
  Top Layer w0.254: U11.1@-19.71,-1.145 -19.508,-1.347 -17.726,-1.347 -16.856,-2.217 -14.837,-2.217 -13.313,-3.741 -13.313,-4.138 -11.748,-5.704 -11.748,-6.278 v1(-11.701,-6.325) ; v1(-8.647,-8.6) -5.979,-11.268 U2.62@-5.979,-14.503
  Bottom Layer w0.254: v1(-11.701,-6.325) -10.132,-6.325 -8.647,-7.81 v1(-8.647,-8.6)
CANHL_N: D6.1 T1.1 U11.6 | length 6.4
  Top Layer w0.381: U11.6@-22.17,-6.25 -22.17,-5.001 v1(-20.597,-3.428)
  Bottom Layer w0.381: D6.1@-21.475,-2.61 -20.657,-3.428 v1(-20.597,-3.428) -20.504,-3.334 -20.067,-3.334 T1.1@-19.275,-2.542
CANHL_P: D6.2 T1.4 U11.7 | length 5.5
  Top Layer w0.381: U11.7@-20.9,-6.25 -20.9,-4.725 v1(-20.1,-3.925)
  Bottom Layer w0.381: D6.2@-21.475,-4.51 -20.685,-4.51 v1(-20.1,-3.925) -20.1,-3.967 T1.4@-19.275,-4.792
CURRENT_1: C12.1 R18.2 U2.8 | length 8.8
  Top Layer w0.254: U2.8@-2.979,-9.003 -2.956,-9.026 -2.314,-9.026 -1.748,-9.591 -1.748,-10.801 -1.555,-10.994 -1.555,-11.02 -1.046,-11.529 -1.534,-11.041 v1(-1.575,-11.041)
  Bottom Layer w0.254: v1(-1.575,-11.041) -1.548,-11.068 0.169,-11.068 1.028,-11.927 2.252,-11.927 C12.1@2.4,-12.075
CURRENT_2: C15.1 R19.2 U2.9 | length 7.2
  Top Layer w0.254: U2.9@-2.979,-8.503 -2.956,-8.526 -2.068,-8.526 -1.384,-9.21 -1.384,-9.716 -1.039,-10.061 R19.2@-1.039,-10.064
  Bottom Layer w0.254: v1(-1.431,-9.163) -1.431,-9.23 -1.255,-9.406 -1.255,-9.541 -0.696,-10.1 C15.1@2.4,-10.1
CURRENT_3: C19.1 R20.2 U2.10 | length 6.8
  Top Layer w0.254: U2.10@-2.979,-8.003 -2.337,-8.003 -2.212,-8.127 -1.329,-8.127 -1.204,-8.003 R20.2@-1.081,-8.125 -0.783,-8.423 -0.783,-9.201 -0.728,-9.256 v1(-0.728,-9.323)
  Bottom Layer w0.254: v1(-0.728,-9.323) 1.802,-9.323 C19.1@2.4,-8.725
EN_GATE: U2.57 U3.33 | length 23.4